# Altium PCB Carte_Standard_PCB.PcbDoc
Units mil, origin at the board's own origin, x right, y up, seen from the top; angles counter-clockwise.
Board outline 2680 x 2480 mil, 2 copper layers (Top Layer, Bottom Layer); 54 components, 82 nets, 284 pads, 68 vias.
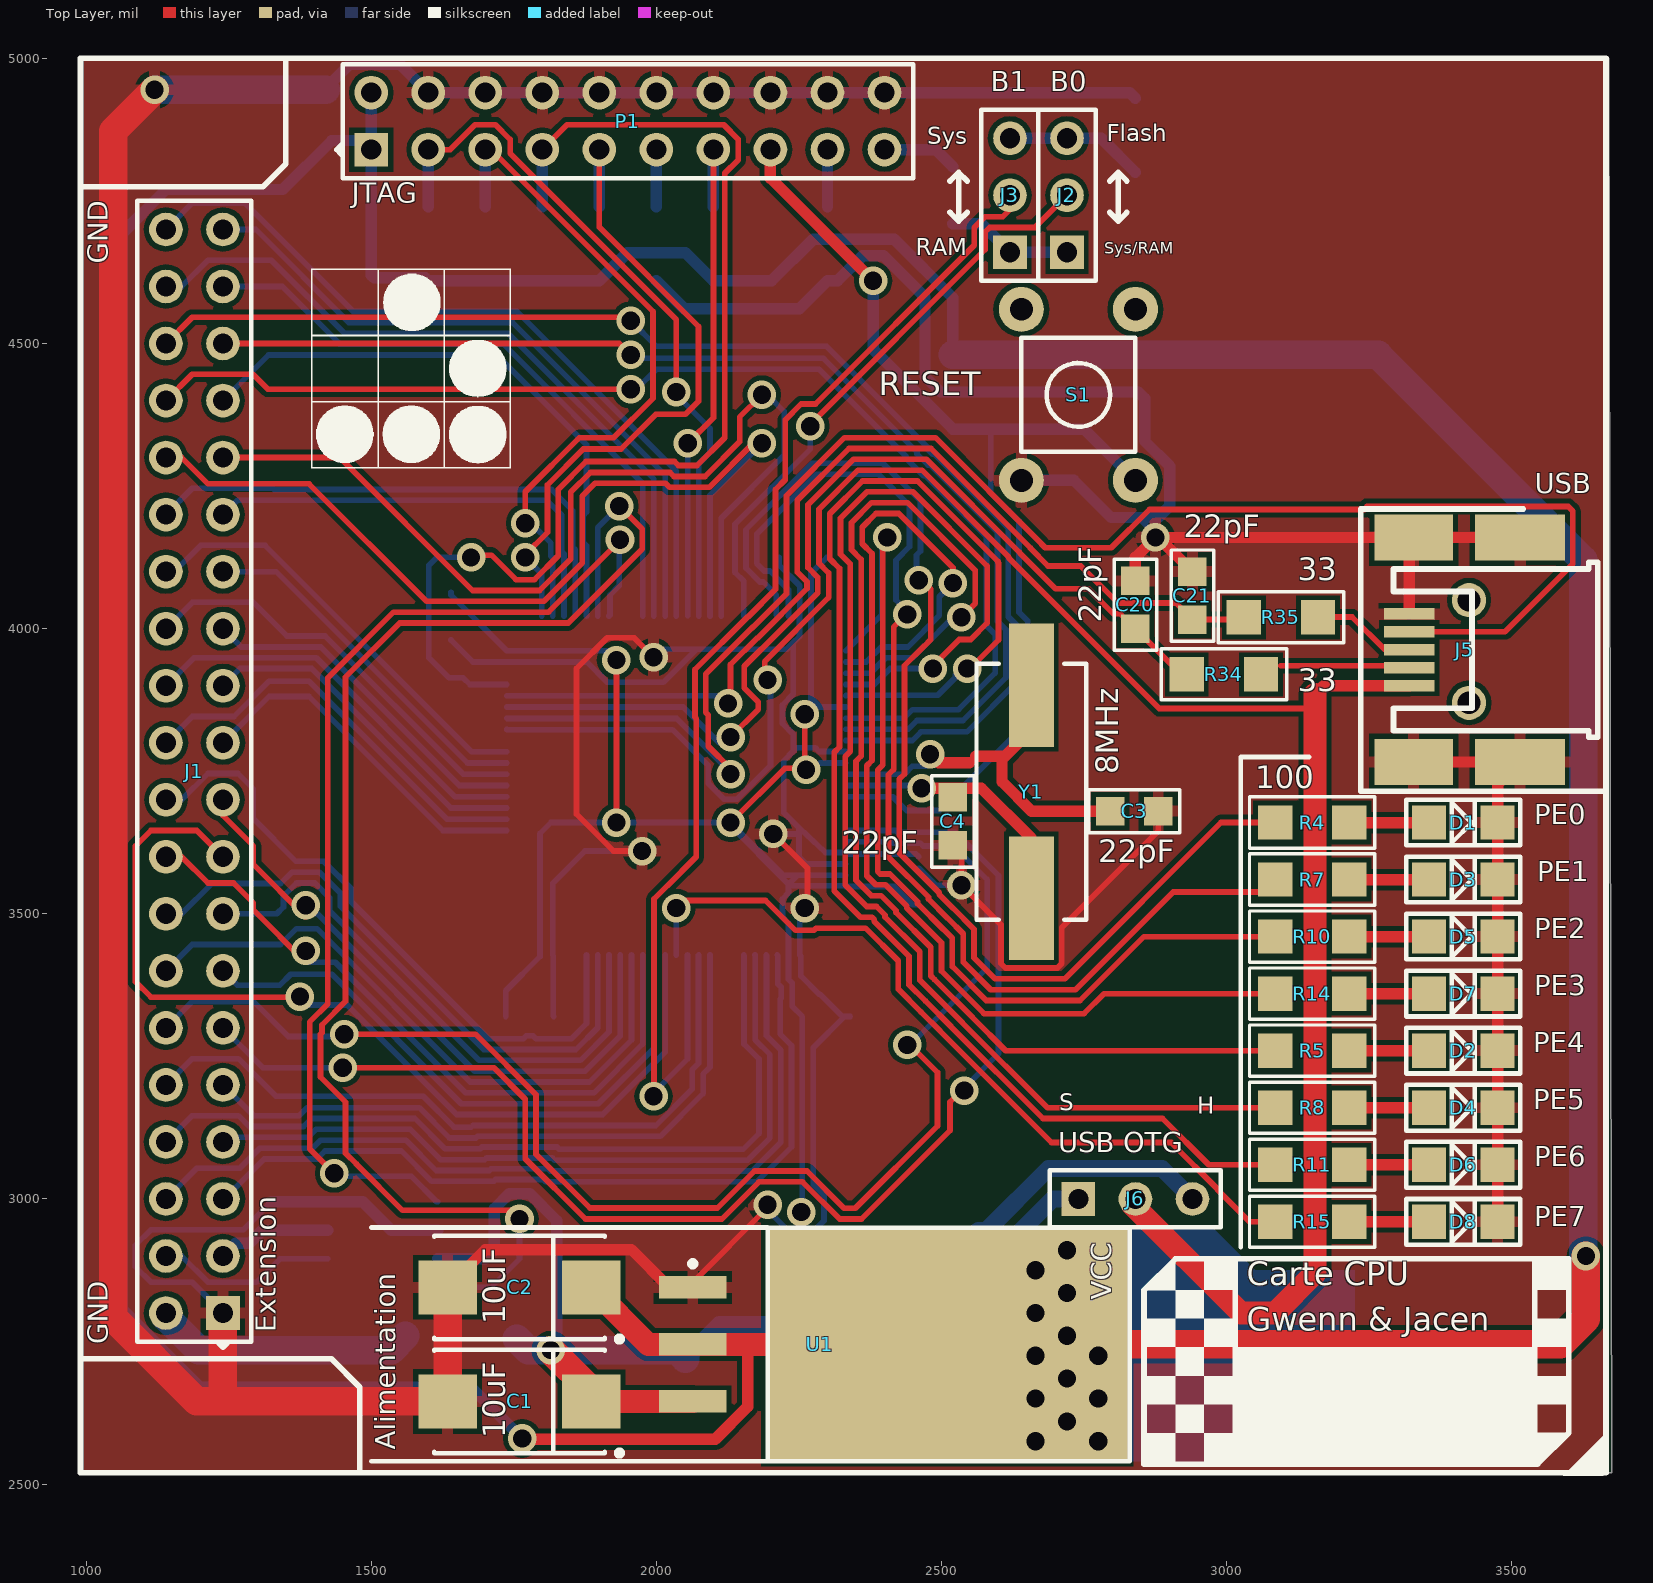
[diagram p0: Top Layer view]
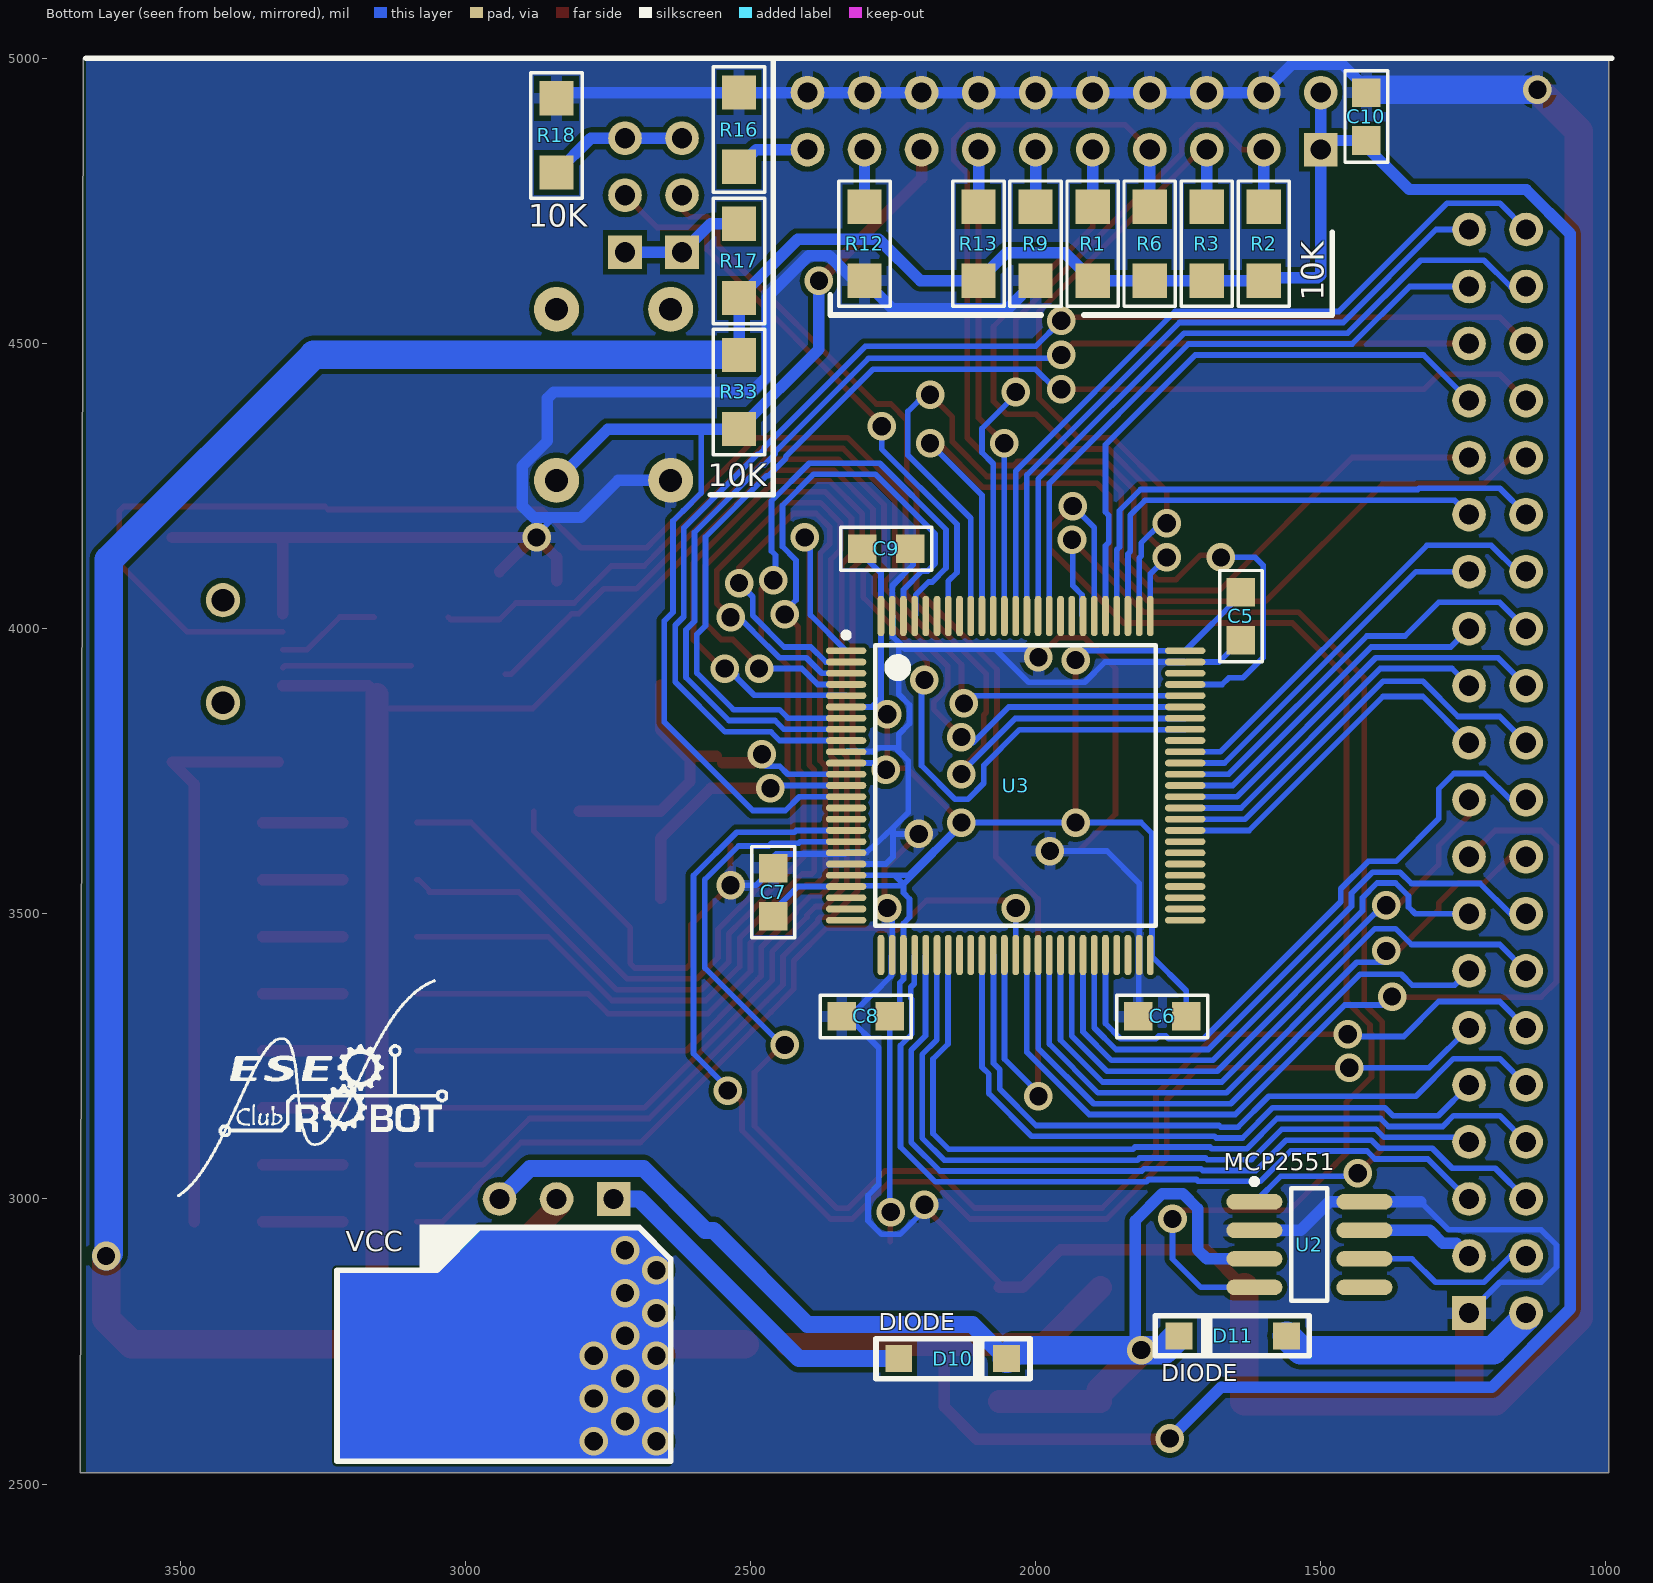
[diagram p1: Bottom Layer view, seen from below]

## Layer stack, top to bottom
Top Layer: signal copper 1.4
Dielectric: dielectric 12.6, FR-4, Dk 4.8
Bottom Layer: signal copper 1.4

## Board outline
995,5000 3670,5000 3675,2520 995,2520

## Design rules (kind name [scope] priority, off if disabled: settings)
Clearance Clearance_QFP [(InComponent('U3') OR InComponent('U4'))] p1: gap=7
Clearance [All] p2: gap=9
HoleSize [All] p1: absolutevalues=TRUE maxlimit=150 minlimit=32 maxpercent=80.000 minpercent=20.000
PlaneClearance [All] p1: clearance=40
PlaneConnect [All] p1: planeconnectstyle=Relief reliefexpansion=20 reliefentries=4 reliefconductorwidth=20 reliefairgap=10
PolygonConnect [All] p1: connectstyle=Relief reliefconductorwidth=20 reliefentries=4 polygonreliefangle="90 Angle"
RoutingVias [All] p1: holewidth=32 width=50 viastyle="Through Hole" minholewidth=32 minwidth=50 maxholewidth=40 maxwidth=50
SilkscreenOverComponentPads [All] p1: minsilkscreentomaskgap=10
SolderMaskExpansion [All] p1: expansion=4
TestPointUsage [All] p1: valid=0 allowmultiple=FALSE
Testpoint [All] p1: side=15 testpointundercomponent=TRUE minsize=40 maxsize=100 preferedsize=60 minholesize=0 maxholesize=40 preferedholesize=32 testpointgrid=1 style=1023 order=0-112345678
Width Width_POWER [(InNet('GND') OR InNet('VCC'))] p1: maxlimit=100 minlimit=10 preferedwidth=16
Width [All] p2: maxlimit=100 minlimit=8 preferedwidth=12
20 further rules are at their usual default settings.

## Components (designator, comment, footprint, x,y, rotation, side; value= is the part's Value field where it differs from the comment)
C1 "10uF" TC7343-2917 1760,2645 r180 top
C2 "10uF" TC7343-2917 1760,2845 r180 top
C3 "22pF" COND_CMS_0805 2880,3680 r180 top
C4 "22pF" COND_CMS_0805 2520,3620 r90 top
C5 "100nF" COND_CMS_0805 1640,3980 r90 bottom
C6 "100nF" COND_CMS_0805 1820,3320 r180 bottom
C7 "100nF" COND_CMS_0805 2460,3580 r270 bottom
C8 "100nF" COND_CMS_0805 2340,3320 r180 bottom
C9 "100nF" COND_CMS_0805 2220,4140 r0 bottom
C10 "100nF" COND_CMS_0805 1420,4940 r270 bottom
C20 "22pF" COND_CMS_0805 2840,4000 r90 top
C21 "22pF" COND_CMS_0805 2940,4100 r270 top
D1 "LED" LED_1206 3475,3660 r90 top
D2 "LED" LED_1206 3475,3260 r90 top
D3 "LED" LED_1206 3475,3560 r90 top
D4 "LED" LED_1206 3475,3160 r90 top
D5 "LED" LED_1206 3475,3460 r90 top
D6 "LED" LED_1206 3475,3060 r90 top
D7 "LED" LED_1206 3475,3360 r90 top
D8 "LED" LED_1206 3475,2960 r90 top
D10 "DIODE" DIODE_CMS_LL4000 2240,2720 r180 bottom
D11 "DIODE" DIODE_CMS_LL4000 1560,2760 r0 bottom
J1 "Extension" HEADER20X2 1240,2800 r90 top
J2 "Jumper" HEADER3 2720,4660 r90 top
J3 "Jumper" HEADER3 2620,4660 r90 top
J5 "USB" MINI_USB_B 3320,3900 r90 top
J6 "Jumper" HEADER3 2740,3000 r0 top
P1 "JTAG" HEADER10X2 1500,4840 r0 top
R1 "10K" RES_CMS_1206 1900,4740 r270 bottom
R2 "10K" RES_CMS_1206 1600,4740 r270 bottom
R3 "10K" RES_CMS_1206 1700,4740 r270 bottom
R4 "100" RES_CMS_1206 3215,3660 r180 top
R5 "100" RES_CMS_1206 3215,3260 r180 top
R6 "10K" RES_CMS_1206 1800,4740 r270 bottom
R7 "100" RES_CMS_1206 3215,3560 r180 top
R8 "100" RES_CMS_1206 3215,3160 r180 top
R9 "10K" RES_CMS_1206 2000,4740 r270 bottom
R10 "100" RES_CMS_1206 3215,3460 r180 top
R11 "100" RES_CMS_1206 3215,3060 r180 top
R12 "10K" RES_CMS_1206 2300,4610 r90 bottom
R13 "10K" RES_CMS_1206 2100,4610 r90 bottom
R14 "100" RES_CMS_1206 3215,3360 r180 top
R15 "100" RES_CMS_1206 3215,2960 r180 top
R16 "10K" RES_CMS_1206 2520,4940 r270 bottom
R17 "10K" RES_CMS_1206 2520,4580 r90 bottom
R18 "10K" RES_CMS_1206 2840,4800 r90 bottom
R33 "10K" RES_CMS_1206 2520,4480 r270 bottom
R34 "33" RES_CMS_1206 3060,3920 r180 top
R35 "33" RES_CMS_1206 3160,4020 r180 top
S1 "RESET" TOUCHE_KSA 2640,4260 r0 top
U1 "LM1086IS-3.3" TO-263 2300,2745 r0 top
U2 "A82C250/MCP2551" SOIC8 1520,2920 r180 bottom
U3 "STM32F107VBT6" LQFP100_N 2035,3725 r180 bottom
Y1 "8MHz" QUARTZ_CMS 2640,3840 r270 top

## Footprints (in the part's own frame and the unit in brackets; to place one, negate y for a bottom-side part, rotate by r counter-clockwise, add the part's x,y. Pads: shape width x height; smd on the part's side, far side on the other; paste and mask are expansions set on the pad)
COND_CMS_0805 [mil] "Capacitor; CMS 0805; 2mmx1.25mm"
  rect 50x50 smd: 1(0,0) 2(84,0)
  silkscreen extent -38,-38 122,38, body extent 1,-24 79,25, height 31
DIODE_CMS_LL4000 [mm] "Power Diode, MELF package"
  rect 1.2x1.2 smd: 1(0,0) 2(4.8,0)
  silkscreen extent -1.02,-0.89 5.84,0.89, body extent 0.66,-0.64 4.16,0.81, height 1.32
HEADER3 [mm] "Connector; Header; 3 Position"
  rect 1.5x1.5 hole 0.9: 1(0,0)
  round 1.5 hole 0.9: 2(2.54,0) 3(5.08,0)
  silkscreen extent -1.27,-1.27 6.35,1.27, body extent -1.27,-1.27 6.35,1.27, height 10.1
HEADER10X2 [mm] "Connector; Header; 10x2 Position"
  rect 1.5x1.5 hole 0.9: 1(0,0)
  round 1.5 hole 0.9: 2(0,2.54) 3(2.54,0) 4(2.54,2.54) 5(5.08,0) 6(5.08,2.54) 7(7.62,0) 8(7.62,2.54) 9(10.16,0) 10(10.16,2.54) 11(12.7,0) 12(12.7,2.54) 13(15.24,0) 14(15.24,2.54) 15(17.78,0) 16(17.78,2.54) 17(20.32,0) 18(20.32,2.54) 19(22.86,0) 20(22.86,2.54)
  silkscreen extent -1.52,-1.27 24.13,3.81, body extent -1.27,-1.27 24.13,3.81, height 10.1
HEADER20X2 [mm] "Connector; Header; 20x2 Position"
  rect 1.5x1.5 hole 0.9: 1(0,0)
  round 1.5 hole 0.9: 2(0,2.54) 3(2.54,0) 4(2.54,2.54) 5(5.08,0) 6(5.08,2.54) 7(7.62,0) 8(7.62,2.54) 9(10.16,0) 10(10.16,2.54) 11(12.7,0) 12(12.7,2.54) 13(15.24,0) 14(15.24,2.54) 15(17.78,0) 16(17.78,2.54) 17(20.32,0) 18(20.32,2.54) 19(22.86,0) 20(22.86,2.54) 21(25.4,0) 22(25.4,2.54) 23(27.94,0) 24(27.94,2.54) 25(30.48,0) 26(30.48,2.54) 27(33.02,0) 28(33.02,2.54) 29(35.56,0) 30(35.56,2.54) 31(38.1,0) 32(38.1,2.54) 33(40.64,0) 34(40.64,2.54) 35(43.18,0) 36(43.18,2.54) 37(45.72,0) 38(45.72,2.54) 39(48.26,0) 40(48.26,2.54)
  silkscreen extent -1.52,-1.27 49.53,3.81, body extent -1.4,-1.27 49.4,3.81, height 10.1
LED_1206 [mil] "3.2 x 1.6 mm SMD CHIP LED LAMP"
  rect 60x60 smd: A(0,120) C(0,0)
  silkscreen extent -40,-40 40,160, body extent -27,-5 30,125, height 54
LQFP100_N [mm] "Thin QFP, 100-Leads, Body 14x14mm, Pitch 0.5mm, IPC Medium Density"
  oval 1.8x0.3 smd: 1(-7.55,6) 2(-7.55,5.5) 3(-7.55,5) 4(-7.55,4.5) 5(-7.55,4) 6(-7.55,3.5) 7(-7.55,3) 8(-7.55,2.5) 9(-7.55,2) 10(-7.55,1.5) 11(-7.55,1) 12(-7.55,0.5) 13(-7.55,0) 14(-7.55,-0.5) 15(-7.55,-1) 16(-7.55,-1.5) 17(-7.55,-2) 18(-7.55,-2.5) 19(-7.55,-3) 20(-7.55,-3.5) 21(-7.55,-4) 22(-7.55,-4.5) 23(-7.55,-5) 24(-7.55,-5.5) 25(-7.55,-6) 51(7.55,-6) 52(7.55,-5.5) 53(7.55,-5) 54(7.55,-4.5) 55(7.55,-4) 56(7.55,-3.5) 57(7.55,-3) 58(7.55,-2.5) 59(7.55,-2) 60(7.55,-1.5) 61(7.55,-1) 62(7.55,-0.5) 63(7.55,0) 64(7.55,0.5) 65(7.55,1) 66(7.55,1.5) 67(7.55,2) 68(7.55,2.5) 69(7.55,3) 70(7.55,3.5) 71(7.55,4) 72(7.55,4.5) 73(7.55,5) 74(7.55,5.5) 75(7.55,6)
  oval 0.3x1.8 smd: 26(-6,-7.55) 27(-5.5,-7.55) 28(-5,-7.55) 29(-4.5,-7.55) 30(-4,-7.55) 31(-3.5,-7.55) 32(-3,-7.55) 33(-2.5,-7.55) 34(-2,-7.55) 35(-1.5,-7.55) 36(-1,-7.55) 37(-0.5,-7.55) 38(0,-7.55) 39(0.5,-7.55) 40(1,-7.55) 41(1.5,-7.55) 42(2,-7.55) 43(2.5,-7.55) 44(3,-7.55) 45(3.5,-7.55) 46(4,-7.55) 47(4.5,-7.55) 48(5,-7.55) 49(5.5,-7.55) 50(6,-7.55) 76(6,7.55) 77(5.5,7.55) 78(5,7.55) 79(4.5,7.55) 80(4,7.55) 81(3.5,7.55) 82(3,7.55) 83(2.5,7.55) 84(2,7.55) 85(1.5,7.55) 86(1,7.55) 87(0.5,7.55) 88(0,7.55) 89(-0.5,7.55) 90(-1,7.55) 91(-1.5,7.55) 92(-2,7.55) 93(-2.5,7.55) 94(-3,7.55) 95(-3.5,7.55) 96(-4,7.55) 97(-4.5,7.55) 98(-5,7.55) 99(-5.5,7.55) 100(-6,7.55)
  silkscreen extent -7.68,-6.25 6.25,6.82, body extent -8,-8 8,8, height 1.6
MINI_USB_B [mm] "Connector; USB; Type B; miniature; Pin Spacing=0.8mm"
  rect 0.5x2.25 smd: 1(0,0) 2(0.8,0) 3(1.6,0) 4(2.4,0) 5(3.2,0)
  rect 2.05x3.5 smd: 6(6.6,-0.2) 9(-3.4,-0.2)
  rect 2.05x4 smd: 7(6.6,-4.935) 8(-3.4,-4.935)
  round 1.524 hole 1.016: 10(3.81,-2.667) 11(-0.762,-2.667)
  silkscreen extent -2.3,-8.4 5.5,0.7, body extent -3.7,-8.51 7,0.69, height 3.95
QUARTZ_CMS [mil] "HC49/4HSMX CRYSTALS; 11.4mm x 4.9mm; Pin spacing=9.5mm"
  rect 216.53x78.73 smd: 1(-61.2,17.6) 2(312.8,17.6)
  silkscreen extent -98,-79 350,114, body extent -170,-70 421,107, height 99
RES_CMS_1206 [mil] "Resistor; CMS 1206; 3.2mmx1.6mm"
  rect 60x60 smd: 1(0,0) 2(130,0)
  silkscreen extent -45,-45 175,45, body extent 2,-30 128,33, height 39
SOIC8 [mm] "8-Pin Small Outline Integrated Circuit 1.27 mm Pitch, IPC Low Density"
  oval 2.5x0.7 smd: 1(-2.45,1.905) 2(-2.45,0.635) 3(-2.45,-0.635) 4(-2.45,-1.905) 5(2.45,-1.905) 6(2.45,-0.635) 7(2.45,0.635) 8(2.45,1.905)
  silkscreen extent -2.58,-2.5 0.8,2.93, body extent -4.32,-2.67 4.07,2.71, height 2.2
TC7343-2917 [mm] "Capacitor, SM Tantalum; Body 7.3 x 4.3 mm (LxW typ)"
  rect 2.6x2.4 smd: 1(-3.2,0) 2(3.2,0)
  silkscreen extent -4.58,-2.3 3.8,2.42, body extent -3.7,-2.13 3.6,2.17, height 2.2
TO-263 [mm] "D2-PAK, 4-Leads, Body 8.6x10.2mm, Pitch 2.54mm, Lead Span 14.2mm, IPC High Density"
  rect 3x1 smd: 1(-6,2.54) 2(-6,0) 3(-6,-2.54)
  rect 16.16x10.45 smd: 4(5.334,0)
  silkscreen extent -6.12,-5.21 13.46,5.2, body extent -7.11,-5 8.56,5, height 4.68
TOUCHE_KSA [mil] "Switch; Push Button; mounted Pcb; Pin Spacing=7.62mm/5.08mm"
  round 79 hole 40: 1(0,0) 2(200,0) 3(200,300) 4(0,300)
  silkscreen extent 0,50 200,250, body extent -20,0 224,312, height 157

## Part data
C1 C2: library part "Cap Pol3", "Polarized Capacitor (Surface Mount)"
C3 C4 C5 C6: library part CONDENSATEUR, "Capacitor"
C7 C8 C9 C10 C20 C21: library part "Cap Semi", "Capacitor (Semiconductor SIM Model)"
D1 D2 D3 D4 D5 D6 D7 D8: "Typical RED, GREEN, YELLOW, AMBER GaAs LED"
D10 D11: "Default Diode"
J1: library part CONNECTEUR_HE10_40
J2 J3 J6: library part BARRETTE3, "Header, 3-Pin"
J5: library part USB_Mini, "USB 1.1, Right Angle, SMT, A Type, Receptacle, 4 Position, White"
P1: library part "Header 10X2", "Header, 10-Pin, Dual row"
R1 R2 R3 R6 R9 R12 R13 R16 R17 R18 R33: library part "Res Semi", "Semiconductor Resistor"
R4 R5 R7 R8 R10 R11 R14 R15 R34 R35: library part RESISTANCE, "Resistor"
S1: library part "BOUTON POUSSOIR", "Switch"
U1: "1.5A Low Dropout Positive Regulators"
U2: library part MCP2551, "High Speed Can Transceiver"
U3: library part STM32F103VBT6, "STM32 ARM-based 32-bit MCU with 64 Kbytes Flash, 100-pin LQFP, Industrial Temperature"
Y1: library part QUARTZ, "Crystal Oscillator"

## Via types
v1: diameter 50, hole 32, Top Layer to Bottom Layer, 67 vias
v2: diameter 50/50 (per signal layer), hole 32, Top Layer to Bottom Layer, 1 vias

## Nets (pads, with @x,y where several pads share a name; then routed paths per layer and width w, separated by ;. In a path a pad name is that pad's centre, name@x,y a point inside that pad or via, vN(x,y) a via of type N, cw(c..) or ccw(c..) an arc to the next point about the centre after c; other vN are vias at no path point)
5V: C1.1 D10.2 D11.2 J6.3 U1.3 U2.3 | length 2172.7
  Top Layer w40: C1.1 U1.3
  Top Layer w50: v1(1815,2735) C1.1@1885.98,2664.02
  Bottom Layer w20: U2.3 1700,2895 1716,2911 1716,2983.23 1741.77,3009 1778.23,3009 1825,2962.23 v1@1825,2745
  Bottom Layer w30: D10.2 2111.02,2780 2400,2780 2565,2945 2579.26,2945 2687.78,3053.53 2886.47,3053.53 J6.3
  Bottom Layer w50: D11.2@1755,2755 1775,2735 v1(1815,2735) 2036.02,2735 D10.2
AN4: J1.5 U3.29 | length 1430.4
  Bottom Layer w10: J1.5 1242.37,3000 1312.37,3070 1404.85,3070 1418.85,3084 1552.89,3084 1605.89,3031 1714.83,3031 1717.83,3034 1802.17,3034 1806.17,3030 2175.72,3030 2237,3091.28 2237,3269.2 2217,3289.2 2217,3350.8 2219,3352.8 2219,3371.39 2212.85,3377.54 2212.85,3427.07 U3.29
AN5: J1.6 U3.30 | length 1505.5
  Bottom Layer w10: J1.6 1193.91,3053.91 1269.41,3053.91 1304.5,3089 1396.98,3089 1410.98,3103 1560.76,3103 1613.76,3050 1706.96,3050 1709.96,3053 1810.04,3053 1814.04,3049 2167.85,3049 2218,3099.15 2218,3261.33 2193.17,3286.17 2193.17,3427.07 U3.30
AN6: J1.7 U3.31 | length 1340.7
  Bottom Layer w10: J1.7 1248,3108 1389.11,3108 1403.11,3122 1568.63,3122 1621.63,3069 1699.09,3069 1702.09,3072 1817.91,3072 1821.91,3068 2159.98,3068 2199,3107.02 2199,3253.46 2173.48,3278.98 2173.48,3427.07 U3.31
AN7: J1.8 U3.32 | length 1433.2
  Bottom Layer w10: J1.8 1186.09,3146.09 1267.04,3146.09 1286.13,3127 1381.24,3127 1395.24,3141 1576.5,3141 1629.5,3088 1691.22,3088 1694.22,3091 1825.78,3091 1829.78,3087 2152.11,3087 2180,3114.89 2180,3245.59 2153.8,3271.8 2153.8,3427.07 U3.32
AN8: J1.9 U3.35 | length 1172.2
  Bottom Layer w10: J1.9 1294,3146 1373.37,3146 1387.37,3160 1584.37,3160 1637.37,3107 1683.35,3107 1686.35,3110 2007.02,3110 2082,3184.98 2082,3219.02 2094.06,3231.08 U3.35
AN9: J1.10 U3.36 | length 1259.1
  Bottom Layer w10: J1.10 1186.09,3246.09 1267.04,3246.09 1333.13,3180 1591.24,3180 1645.24,3126 1675.48,3126 1678.48,3129 1999.15,3129 2063,3192.85 2063,3226.89 2074,3237.89 2074,3427.39 U3.36
AN12: J1.11 U3.17 | length 2378.9
  Top Layer w10: v1(1450,3230) 1715,3230 1770,3175 1770,3070.65 1875.65,2965 2114.85,2965 2179.85,3030 2256.11,3030 2321.4,2964.71 2359.71,2964.71 2515,3120 2515,3170 2540,3195 v1(2540,3190)
  Bottom Layer w10: J1.11 1310,3230 v1(1450,3230) ; U3.17 2419.85,3646.26 2423.11,3643 2524.02,3643 2600,3567.02 2600,3255 v1@2541.5,3196.5
AN13: J1.12 U3.18 | length 2499
  Top Layer w10: v1(1452.59,3289) 1682.87,3289 1789,3182.87 1789,3078.52 1883.52,2984 2106.98,2984 2171.98,3049 2263.98,3049 2329.27,2983.71 2348.86,2983.71 2493,3127.85 2493,3222 2445,3270 v1(2440,3270)
  Bottom Layer w10: J1.12 1186.09,3346.09 1293.37,3346.09 1354.46,3285 1450,3285 1450,3290 1451,3289 v1(1452.59,3289) ; U3.18 2412.66,3626.57 2415.24,3624 2462.87,3624 2467.87,3619 2521.15,3619 2580,3560.15 2580,3405 2443,3268 2442,3268 v1(2440,3270)
GND: C1.2 C2.2 C3.1 C4.1 C5.1 C6.1 C7.1 C8.1 C9.1 C10.1 C20.2 C21.1 D1.C D2.C D3.C D4.C D5.C D6.C D7.C D8.C J1.1 J5.5 J5.6 J5.7 J5.8 J5.9 P1.4 P1.6 P1.8 P1.10 P1.12 P1.14 P1.16 P1.18 P1.20 R9.2 R12.1 R16.1 R18.2 S1.1 U1.1 U2.2 U2.8 U3.10 U3.19 U3.20 U3.27 U3.49 U3.74 U3.99 | length 14573.7
  Top Layer w10: v1(1975,3610) 1924.85,3610 1860,3674.85 1860,3930.15 1913.85,3984 1961,3984 v1(1995,3950) ; U1.1@2063.78,2853.78 2195,2985 v1(2195,2990) ; v1(2205,3640) 2265,3580 2265,3515 v1(2260,3510) ; C4.1@2535,3620 v1(2535,3550) 2604.23,3480.77 2604.23,3413.13 2612.43,3404.93 2702.77,3404.93 2710.97,3413.13 2710.97,3476.12 2880,3645.15 C3.1 ; J5.8@3506.73,3765 J5.8@3507.87,3766.14
  Top Layer w20: C2.2 1700.26,2911.24 1956.17,2911.24 2022.41,2845 U1.1 ; C20.2 2840,4125 v1(2875,4160) 2875.16,4159.84 v1@2880.16,4159.84 ; C21.1 v1@2880.16,4159.84 ; J5.5 3320,4151.97 J5.6 ; J5.9 3507.87,3766.14 J5.8 3475,3726.85 D1.C D3.C D5.C D7.C D2.C D4.C D6.C D8.C ; J5.7 J5.6 ; v1@2880.16,4159.84 J5.6
  Top Layer w50: v1(1120,4945) 1047.63,4872.63 1047.63,2791.63 1194.26,2645 1240,2645 ; J1.1 1240,2645 ; C2.2 C1.2 1240,2645
  Bottom Layer w10: J1.1 1186.09,2853.91 1113.63,2853.91 1086.63,2880.91 1086.63,2919.09 1113.63,2946.09 1276.09,2946.09 1325,2995 ; C10.1@1400,4940 C10.1@1412.94,4940 ; C5.1 1678.46,3941.54 U3.74 1878.31,3941.54 1913.85,3906 2012.56,3906 2070.55,3964 ; C6.1 1819.15,3320.85 1819.15,3427.07 U3.49 1818.46,3553.46 1875,3610 v1(1975,3610) ; v1(1995,3950) 2009,3964 2070.55,3964 ; v1(2195,2990) 2195,2980.8 2237.85,2937.95 2270.15,2937.95 2294,2961.8 2294,3006.15 2275,3025.15 2275,3265.15 2329.85,3320 C8.1 2325.8,3320 2286.8,3359 2285.13,3359 2253.31,3390.81 2253.31,3425.98 U3.27 2251.54,3496.54 2260,3505 v1(2260,3510) ; v1(2205,3640) 2245,3640 ; C9.1@2215,4125 2215,4111.87 2251.54,4075.33 U3.99 ; U3.20@2316.76,3587.2 U3.20 2262.8,3587.2 2250,3600 2250,3650.9 ; U3.10 2331.56,3784.74 2285.41,3784.74 2278.73,3791.42 2246.42,3791.42 2240,3785 ; C7.1 2490,3550 v1(2535,3550) ; C7.1@2460,3600 2455,3605 2334.13,3605 U3.19 2331.56,3607.57 2296.39,3607.57 2250,3650.9 ; 2845,4195 v1@2875,4165 ; 2070.55,3964 2228.46,3964 2240,3975.54 ; 2240,3785 2223.58,3768.58 2223.58,3677.32 2250,3650.9 ; 2240,3785 2240,3814.85 2221,3833.85 2221,3866.15 2240,3885.15 2240,3975.54 ; 2240,3975.54 2250.85,3986.39 ; 2250.85,3986.39 2251.54,3987.08 U3.99 ; 2250.85,3986.39 2250.85,4021.56 U3.99
  Bottom Layer w20: 1325,2995 U2.8 1485,2995 1535,2945 U2.2 ; C10.1@1412.94,4940 1462.94,4990 1550,4990 P1.4 P1.6 P1.8 P1.10 P1.12 P1.14 P1.16 P1.18 P1.20 R16.1 2830,4940 R18.2 ; R9.2 2049,4561 2251,4561 R12.1 2317.77,4610 2361.77,4654 2398.23,4654 2471,4581.23 2471,4442.13 2498.13,4415 2845,4415 2856,4404 2856,4329 2900,4285 2900,4215 2880,4195 2845,4195 2797.23,4195 2732.23,4260 S1.1
  Bottom Layer w50: v1(1120,4945) C10.1@1420,4945
NetC3_2: C3.2 U3.12 Y1.1 | length 717.6
  Top Layer w10: 2549,3765 2560,3776
  Top Layer w20: v1(2480,3780) 2495,3765 2549,3765 ; 2560,3776 2610,3776 ; Y1.1 2657.6,3822.6 2606,3771 2606,3731.77 2657.77,3680 C3.2@2800,3680
  Bottom Layer w10: U3.12 2434.53,3744.69 2448.85,3759 2473,3759 2480,3766 v1(2480,3780)
NetC4_2: C4.2 U3.13 Y1.2 | length 473.1
  Top Layer w20: v1(2465,3720) 2470,3715 2475,3715 2480,3720 2570,3720 2657.6,3632.4 Y1.2
  Bottom Layer w10: U3.13 2460,3725 v1(2465,3720)
NetC20_1: C20.1 R34.2 U3.70 | length 1774.7
  Top Layer w10: v1(2130,3810) 2130.15,3810 2178.85,3858.69 2178.85,3871 2154,3895.85 2154,3934.15 2183.85,3964 2184.61,3964 2283,4062.39 2283,4090 2266,4107 2266,4217.26 2345.74,4297 2473.6,4297 2636.95,4133.65 2636.95,4133.05 2700,4070 2757.33,4070 2801.33,4026 2814,4026 C20.1 2920,3920 R34.2
  Bottom Layer w10: U3.70 2047.2,3862.8 2110,3800 2120,3800 v1(2130,3810)
NetC21_2: C21.2 R35.2 U3.71 | length 1795.9
  Top Layer w10: v1@2130,3865 2130,3937.02 2175.98,3983 2176.74,3983 2264,4070.26 2264,4082.13 2247,4099.13 2247,4225.13 2337.87,4316 2481.47,4316 2655.95,4141.52 2655.95,4140.92 2686.87,4110 2744.2,4110 2809.2,4045 2911,4045 C21.2 3026,4016 R35.2
  Bottom Layer w10: U3.71 1795,3882.48 ; 1822.52,3882.48 1795,3882.48 ; v1(2125.69,3869) 2125.69,3877.31 2120.52,3882.48 1795,3882.48
NetD1_1: D1.A R4.1 | length 140
  Top Layer w20: R4.1 D1.A
NetD2_1: D2.A R5.1 | length 140
  Top Layer w20: R5.1 D2.A
NetD3_1: D3.A R7.1 | length 140
  Top Layer w20: R7.1 D3.A
NetD4_1: D4.A R8.1 | length 140
  Top Layer w20: R8.1 D4.A
NetD5_1: D5.A R10.1 | length 140
  Top Layer w20: R10.1 D5.A
NetD6_1: D6.A R11.1 | length 140
  Top Layer w20: R11.1 D6.A
NetD7_1: D7.A R14.1 | length 140
  Top Layer w20: R14.1 D7.A
NetD8_1: D8.A R15.1 | length 140
  Top Layer w20: R15.1 D8.A
NetD10_1: D10.1 J6.1 | length 596
  Bottom Layer w30: D10.1 2415,2720 2695,3000 J6.1@2720,3000
NetD11_1: D11.1 J1.2 | length 461.5
  Bottom Layer w50: J1.2 1140,2792.86 1197.86,2735 1535,2735 D11.1
NetJ1_3: J1.3 U2.7 | length 202.2
  Bottom Layer w20: J1.3 1262.09,2922.09 1286.03,2922.09 1308.94,2945 U2.7
NetJ1_4: J1.4 U2.6 | length 319.7
  Bottom Layer w10: J1.4 1167.54,2900 1213.63,2853.91 1298.91,2853.91 1340,2895 U2.6
NetJ1_29: J1.29 U3.78 | length 793.7
  Bottom Layer w10: J1.29 1265,4225 1808.15,4225 1834,4199.15 1834,4135.24 1838.15,4131.09 U3.78@1838.15,4022.24
NetJ1_30: J1.30 U3.79 | length 935.1
  Bottom Layer w10: J1.30 1186.09,4246.09 1327.91,4246.09 1330,4244 1816.02,4244 1853.06,4206.96 1853,4206.89 1853,4143.11 1857.83,4138.27 U3.79
NetJ1_31: J1.31 U3.92 | length 1743
  Top Layer w10: J1.31 1444.85,4300 1677.85,4067 1795,4067 1850,4122 1850,4239.39 1884.61,4274 2023.98,4274 2030.98,4267 2085.13,4267 2146,4327.87 2146,4371 v1(2185,4410)
  Bottom Layer w10: U3.92 2113.74,4193.74 2224,4304 2224,4381 2190,4415 v1(2185,4410)
NetJ1_32: J1.32 U3.91 | length 1679.2
  Top Layer w10: J1.32 1167.54,4300 1213.63,4253.91 1391.09,4253.91 1597,4048 1803,4048 1870,4115 1870,4232.52 1892.48,4255 2016.11,4255 2023.11,4248 2093,4248 2170,4325 v1(2185,4325)
  Bottom Layer w10: U3.91 2094.06,4234.06 v1(2185,4325)
NetJ2_1: J2.1 J3.1 R17.2 | length 220.7
  Bottom Layer w20: R17.2 2570,4710 J3.1 J2.1
NetJ2_2: J2.2 U3.94 | length 1034.5
  Top Layer w10: v1(2270,4355) 2267.71,4355 2267.71,4355.84 2576.47,4664.6 2576.47,4695.33 2584.67,4703.53 2663.53,4703.53 J2.2
  Bottom Layer w10: U3.94 2153.11,4083.35 2138,4098.46 2138,4183 2270,4315 v1(2270,4355)
NetJ2_3: J2.3 J3.3 R18.1 | length 244.9
  Bottom Layer w20: J3.3 J2.3 2780,4860 R18.1
NetJ3_2: J3.2 U3.37 | length 2146.5
  Top Layer w10: v1(1995,3180) 1996,3181 1996,3526.15 2018.85,3549 2019,3549 2070,3600 2070,3842.67 2067.69,3844.98 2067.69,3928.46 2160.24,4021 2161,4021 2209,4069 2209,4244 2226,4261 2226,4366.15 2253.85,4394 2279,4394 2557.47,4672.47 2557.47,4703.2 2576.8,4722.53 2607.53,4722.53 2620,4735 J3.2
  Bottom Layer w10: v1(1995,3180) 1995,3185.76 2054.69,3245.45 U3.37
NetJ5_1: J5.1 J6.2 U3.68 | length 3770.1
  Top Layer w10: v1(2195,3910) 2190,3915 2190,3942.52 2302,4054.52 2302,4097.87 2285,4114.87 2285,4209.39 2353.61,4278 2465.73,4278 2617.95,4125.78 2617.95,4123.92 2881.87,3860 3140,3860 3155,3875 3155,3885
  Top Layer w20: 3155,3885 3170,3900 J5.1
  Top Layer w40: J6.2@2835,2990 3025,2800 3085,2800 3155,2870 3155,3885
  Bottom Layer w10: U3.68 1738.25,3822.93 2028.33,3822.93 2091,3760.26 2091,3728.85 2118.85,3701 2141.15,3701 2200,3759.85 2200,3905.15 v1@2195,3910.15 ; v1(2195,3910) v1@2195,3910.15 ; v1@2195,3910.15 2194.85,3910.31 2194.85,3912.13 2195,3912.13 v1@2195,3910.15
NetJ5_2: J5.2 R34.1 | length 226.5
  Top Layer w10: 3095,3935 3316.5,3935 J5.2
NetJ5_3: J5.3 R35.1 | length 184.1
  Top Layer w10: R35.1 3160.56,4020.56 3220,4020.56 3277.56,3962.99 J5.3
NetJ5_4: J5.4 U3.69 | length 2963.2
  Top Layer w10: v1(2130,3745) 2130,3754.85 2091,3793.85 2091,3848.54 2086.69,3852.85 2086.69,3920.59 2168.11,4002 2168.87,4002 2228,4061.13 2228,4233 2330,4335 2489.34,4335 2674.95,4149.39 2674.95,4148.79 2681.74,4142 2797.66,4142 2864.66,4209 3241,4209 3246.2,4214.2 3598.83,4214.2 3607.03,4206 3607.03,4113.69 3487.83,3994.49 J5.4
  Bottom Layer w10: U3.69 1738.44,3842.43 2035.7,3842.43 2130,3748.13 v1(2130,3745)
NetP1_3: P1.3 R2.1 U3.90 | length 1268.3
  Top Layer w10: P1.3 1638.44,4840 1681.97,4883.53 1718.03,4883.53 1743.53,4858.03 1743.53,4833.5 2035,4542.02 v1(2035,4415)
  Bottom Layer w10: v1(2035,4415) 2030,4415 2094,4351 2094,4308.85 2074.37,4289.22 U3.90
  Bottom Layer w20: R2.1 P1.3
NetP1_5: P1.5 R3.1 U3.77 | length 1199.4
  Top Layer w10: P1.5 1710.15,4840 1994,4556.15 1994,4403.85 1925.15,4335 1865,4335 1770,4240 v1(1770,4185)
  Bottom Layer w10: v1(1770,4185) 1780,4185 1815,4150 1815,4127.37 1818.46,4123.9 U3.77
  Bottom Layer w20: R3.1 P1.5
NetP1_7: P1.7 R6.1 U3.72 | length 2044.4
  Top Layer w10: v1(1675,4125) 1679,4129 1710.85,4129 1753.85,4086 1786.15,4086 1828,4127.85 1828,4244.26 1876.74,4293 2031.85,4293 2038.85,4286 2071.15,4286 2120,4334.85 2120,4798.44 2143.53,4821.97 2143.53,4858.03 2118.03,4883.53 1843.53,4883.53 P1.7
  Bottom Layer w10: v1(1675,4125) 1615,4125 1601,4111 1601,3949.2 1636.2,3914 1661.15,3914 1672.99,3902.17 U3.72
  Bottom Layer w20: R6.1 P1.7
NetP1_9: P1.9 R1.1 U3.76 | length 1182.2
  Top Layer w10: v1(1770,4125) 1770,4129.85 1809,4168.85 1809,4252.13 1871.87,4315 1938.13,4315 1999.13,4376 2051.15,4376 2074,4398.85 2074,4529.89 1900,4703.89 P1.9
  Bottom Layer w10: v1@1777.5,4107.5 1787.5,4107.5 1798.78,4096.22 U3.76
  Bottom Layer w20: R1.1 P1.9
NetP1_11: P1.11 R9.1 | length 100
  Bottom Layer w20: R9.1 P1.11
NetP1_13: P1.13 R13.2 U3.89 | length 936.1
  Top Layer w10: v1(2055,4325) 2100,4370 P1.13
  Bottom Layer w10: U3.89@2055,4022.56 v1(2055,4325)
  Bottom Layer w20: R13.2 P1.13
NetP1_15: P1.15 R33.2 S1.2 U3.14 | length 1912.6
  Top Layer w20: P1.15 2200,4790 v1(2380,4610)
  Bottom Layer w10: U3.14 2414.53,3705.32 2438.85,3681 2496.15,3681 2651,3835.85 2651,4013.85 2636,4028.85 2636,4189 2618.5,4206.5 2617.84,4206.5 2586.5,4237.84 2586.5,4348.5
  Bottom Layer w20: v1(2380,4610) 2380,4490 R33.2 2750,4350 S1.2
NetP1_17: P1.17 R12.2 | length 100
  Bottom Layer w20: R12.2 P1.17
NetP1_19: P1.19 R16.2 | length 132.4
  Bottom Layer w20: P1.19 2490,4840 R16.2
NetR4_2: R4.2 U3.97 | length 2111.4
  Top Layer w10: v1(2460,4085) 2461,4086 2464,4086 2481,4069 2481,3981 2469,3969 2468.85,3969 2435,3935.15 2435,3745.15 2426,3736.15 2426,3607.09 2496,3537.09 2496,3533.85 2518.85,3511 2519,3511 2557,3473 2557,3423.11 2594.18,3385.93 2715.93,3385.93 2990,3660 R4.2
  Bottom Layer w10: U3.97 2210.39,4024.02 2210.39,4059.19 2187.57,4082 2181.33,4082 2157,4106.33 2157,4173.67 2273.33,4290 2396.87,4290 2463,4223.87 2463,4135.98 2456,4128.98 2456,4089 v1(2460,4085)
NetR5_2: R5.2 U3.3 | length 2149.1
  Top Layer w10: v1(2535,4020) 2559,4044 2559,4102.26 2440.26,4221 2377.22,4221 2342,4185.78 2342,4138.48 2359,4121.48 2359,3776.63 2350,3767.63 2350,3558.74 2376.82,3531.92 2393.69,3531.92 2420,3505.61 2420,3502.37 2481,3441.37 2481,3391.52 2487.52,3385 2487.63,3385 2555,3317.63 2555,3317.52 2612.52,3260 R5.2
  Bottom Layer w10: U3.3@2332.24,3921.85 2374.98,3921.85 2402.13,3949 2448.85,3949 2468.85,3969 2469,3969 2520,4020 v1(2535,4020) v1@2540,4020
NetR7_2: R7.2 U3.98 | length 2045.2
  Top Layer w10: v1(2440,4025) 2438,4025 2416,4003 2416,3753.02 2407,3744.02 2407,3599.22 2477,3529.22 2477,3525.98 2510.98,3492 2511.13,3492 2538,3465.13 2538,3415.24 2586.31,3366.93 2735.06,3366.93 2906.26,3538.13 R7.2@3060,3538.13 ; R7.2@3063.13,3538.13 R7.2@3060,3538.13 ; R7.2 3081.87,3560 R7.2@3060,3538.13
  Bottom Layer w10: U3.98@2231.85,4022.24 2231.85,4068.15 2199,4101 2189.2,4101 2176,4114.2 2176,4165.8 2281.2,4271 2389,4271 2444,4216 2444,4143.85 2421.15,4121 2421,4121 2420,4120 2420,4050 2440,4030 v1(2440,4025)
NetR8_2: R8.2 U3.4 | length 2331.1
  Top Layer w10: v1(2485,3930) 2485,3935 2531,3981 2551.15,3981 2580,4009.85 2580,4105.15 2579.95,4105.21 2579.95,4110.04 2449.99,4240 2369.35,4240 2323,4193.65 2323,4130.61 2340,4113.61 2340,3784.5 2331,3775.5 2331,3550.87 2368.95,3512.92 2385.82,3512.92 2401,3497.74 2401,3494.5 2462,3433.5 2462,3383.65 2479.65,3366 2479.76,3366 2536,3309.76 2536,3309.65 2685.65,3160 R8.2
  Bottom Layer w10: U3.4 2382.17,3902.17 2410,3930 v1(2485,3930) v1@2490,3930
NetR10_2: R10.2 U3.1 | length 1673.5
  Top Layer w10: v1@2397,4147 2397,3760.89 2388,3751.89 2388,3574.48 2392.56,3569.92 2409.43,3569.92 2458,3521.35 2458,3518.11 2503.11,3473 2503.26,3473 2519,3457.26 2519,3407.37 2578.44,3347.93 2742.93,3347.93 2855,3460 R10.2
  Bottom Layer w10: U3.1 2395,4023.98 2395,4150 v1(2405,4160)
NetR11_2: R11.2 U3.5 | length 2502.1
  Top Layer w10: v1(2545,3930) 2550,3930 2600,3980 2600,4115 2598.95,4116.05 2598.95,4117.91 2457.86,4259 2361.48,4259 2304,4201.52 2304,4122.74 2321,4105.74 2321,3792.37 2312,3783.37 2312,3539.87 2357.95,3493.92 2377.95,3493.92 2382,3489.87 2382,3486.63 2443,3425.63 2443,3375.78 2471.78,3347 2471.89,3347 2517,3301.89 2517,3301.78 2677.78,3141 2887.43,3141 2968.43,3060 R11.2
  Bottom Layer w10: U3.5 2332.93,3883.17 2493.32,3883.17 2524,3913.85 2524,3919 2535,3930 v1(2545,3930)
NetR14_2: R14.2 U3.2 | length 1983.4
  Top Layer w10: v1(2520,4080) 2520,4106.91 2424.91,4202 2385.09,4202 2361,4177.91 2361,4148.85 2378,4131.85 2378,3768.76 2369,3759.76 2369,3566.61 2384.69,3550.92 2401.56,3550.92 2439,3513.48 2439,3510.24 2500,3449.24 2500,3399.5 2574.5,3325 2750,3325 2785,3360 R14.2
  Bottom Layer w10: U3.2 2367.8,3941.54 2394.26,3968 2440.98,3968 2496,4023.02 2496,4056 v1(2520,4080)
NetR15_2: R15.2 U3.38 | length 1404.6
  Top Layer w10: v1(2035,3510) 2048.45,3523.45 2191.39,3523.45 2243.85,3471 2276.15,3471 2280.08,3474.92 2366.83,3474.92 2424,3417.76 2424,3367.91 2463.91,3328 2464.02,3328 2498,3294.02 2498,3293.91 2692.91,3099 2902.56,3099 2983.53,3018.03 2983.53,3016.47 3040,2960 R15.2
  Bottom Layer w10: U3.38 v1(2035,3510)
NetU2_1: U2.1 U3.82 | length 1871.1
  Top Layer w10: v1@1425,3055 v1(1435,3045) 1392,3088 1392,3310.43 1424,3342.43 1424,3914 1539,4029 1810.87,4029 1936.2,4154.33 v1(1936.2,4156)
  Bottom Layer w10: v1(1435,3045) 1440,3040 1570.02,3040 1615.02,2995 U2.1 ; U3.82 1918.67,4024.02 1918.67,4059.19 1935,4075.52 v1@1935,4156
NetU2_4: U2.4 U3.81 | length 2410.7
  Top Layer w10: v1(1760,2965) 1760,2980 1555,2980 1474,3061 1474,3061.15 1455,3080.15 1455,3169.85 1411,3213.85 1411,3288.98 1413.59,3291.57 1413.59,3305.15 1455,3346.57 1455,3915 1550,4010 1845.36,4010 1975.2,4139.85 1975.2,4174.8 v2(1935,4215)
  Bottom Layer w10: U2.4 1710,2845 1760,2895 1760,2980 v1(1760,2965) ; U3.81 1897.2,4177.2 v2(1935,4215)
PC12: J1.33 U3.80 | length 1040.7
  Bottom Layer w10: J1.33 1320,4480 1720,4480 1877.52,4322.48 1877.52,4204.54 1872,4199.02 1872,4150.98 1877.52,4145.46 U3.80
PC13: J1.34 U3.7 | length 2146.8
  Top Layer w10: J1.34 1186.09,4446.09 1292.46,4446.09 1318.55,4420 v1(1955,4420)
  Bottom Layer w10: v1(1955,4420) 1965,4420 2000,4455 2285,4455 2438,4302 2438,4298.46 2468.46,4268 2472,4268 2579,4161 2579,4005.24 2594,3990.24 2594,3922.13 2529.87,3858 2449.11,3858 2434.22,3843.11 U3.7
PC14: J1.35 U3.8 | length 2064
  Top Layer w10: J1.35 1935,4500 v1(1955,4480)
  Bottom Layer w10: v1@1965,4474 2292.87,4474 2457,4309.87 2457,4306.33 2476.33,4287 2479.87,4287 2598,4168.87 2598,4013.11 2613,3998.11 2613,3914.26 2537.74,3839 2456.98,3839 2441.4,3823.43 U3.8
PC15: J1.36 U3.9 | length 2270
  Top Layer w10: J1.36 1186.09,4546.09 1948.91,4546.09 v1(1955,4540)
  Bottom Layer w10: v1(1955,4540) 2000,4495 2298.74,4495 2476,4317.74 2476,4314.2 2484.2,4306 2487.74,4306 2617,4176.74 2617,4020.98 2632,4005.98 2632,3906.39 2544.61,3819 2463.85,3819 2448.85,3804 2332.5,3804 U3.9
PD4: J1.37 U3.85 | length 1111.6
  Bottom Layer w10: J1.37 1344,4600 1445,4499 1731.94,4499 1975.94,4255 U3.85
PD5: J1.38 U3.86 | length 1273.7
  Bottom Layer w10: J1.38 1167.54,4600 1213.63,4646.09 1324.78,4646.09 1452.87,4518 1739.81,4518 1995.63,4262.18 U3.86
PD6: J1.39 U3.87 | length 1200.8
  Bottom Layer w10: J1.39 1297.74,4700 1460.74,4537 1747.68,4537 2015.32,4269.37 U3.87
PD7: J1.40 U3.88 | length 1362.8
  Bottom Layer w10: J1.40 1186,4746 1278.61,4746 1468.61,4556 1755.55,4556 2035,4276.55 U3.88
PE8: J1.17 U3.39 | length 1701
  Top Layer w10: J1.17 1193.91,3646.09 1113.63,3646.09 1086.63,3619.09 1086.63,3380.91 1113.63,3353.91 1371.09,3353.91 1385,3340 1385,3345 v1(1375,3355)
  Bottom Layer w10: v1(1375,3355) 1385,3345 1385,3340 1458.11,3340 1650.11,3148 1906.09,3148 2015.32,3257.23 U3.39
PE10: J1.18 U3.41 | length 1243.4
  Top Layer w10: J1.18 1167.54,3600 1213.63,3553.91 1258.55,3553.91 1293.37,3519.09 1293.37,3506.63 1385,3415 v1(1385,3435)
  Bottom Layer w10: v1(1385,3435) 1385,3420 1390,3415 1436.85,3415 1665.85,3186 1890.35,3186 1975.94,3271.59 U3.41
PE12: J1.19 U3.43 | length 1134.3
  Top Layer w10: J1.19 1240,3672.46 1293.37,3619.09 1293.37,3586.63 1385,3495 1384.39,3495 1385,3495.61 v1(1385,3515)
  Bottom Layer w10: v1(1385,3515) 1385,3500 1405.59,3500 1681.59,3224 1874.61,3224 1936.57,3285.96 U3.43
PE15: J1.20 U3.46 | length 1128.6
  Bottom Layer w10: J1.20 1167.54,3700 1213.63,3746.09 1266.37,3746.09 1293.37,3719.09 1293.37,3666.63 1368,3592 1416.89,3592 1465,3543.89 1465,3521.2 1705.2,3281 1766.8,3281 1771.8,3286 1784.2,3286 1789.2,3281 1851,3281 1877.52,3307.52 U3.46
T1_CH1: J1.13 U3.40 | length 1071.6
  Bottom Layer w10: J1.13 1265.05,3374.95 1339.8,3374.95 1358.85,3394 1430.98,3394 1657.98,3167 1898.22,3167 1995.63,3264.41 U3.40
T1_CH2: J1.14 U3.42 | length 1137.9
  Bottom Layer w10: J1.14 1186.09,3446.09 1340.93,3446.09 1368.85,3474 1404.72,3474 1673.72,3205 1882.48,3205 1956.26,3278.78 U3.42
T1_CH3: J1.15 U3.44 | length 1008.1
  Bottom Layer w10: J1.15 1334.24,3500 1346,3511.76 1346,3531.15 1368.85,3554 1401.15,3554 1427,3528.15 1427,3505.46 1689.46,3243 1866.74,3243 1916.89,3293.15 U3.44
T1_CH4: J1.16 U3.45 | length 1072.9
  Bottom Layer w10: J1.16 1167.54,3500 1220.54,3553 1340.98,3553 1360.98,3573 1409.02,3573 1446,3536.02 1446,3513.33 1697.33,3262 1858.87,3262 1897.2,3300.33 U3.45
T3_CH1: J1.25 U3.63 | length 611.7
  Bottom Layer w10: J1.25 1272,3968 1411.35,3968 1654.35,3725 U3.63
T3_CH2: J1.26 U3.64 | length 746.7
  Bottom Layer w10: J1.26 1186.09,4046.09 1293.37,4046.09 1352.46,3987 1415,3987 ; 1410,3987 1415,3987 ; U3.64 1661.53,3744.69 1419.22,3987 1415,3987
T3_CH3: J1.27 U3.65 | length 636.8
  Bottom Layer w10: J1.27 1333.09,4100 1668.72,3764.37 U3.65
T3_CH4: J1.28 U3.66 | length 766.8
  Bottom Layer w10: J1.28 1155,4100 1201.09,4146.09 1313.91,4146.09 1675.94,3784.06 U3.66
T4_CH1: J1.21 U3.59 | length 628.5
  Bottom Layer w10: J1.21 1320.97,3880.97 1390.9,3880.97 1625.61,3646.26 U3.59
T4_CH2: J1.22 U3.60 | length 742.6
  Bottom Layer w10: J1.22 1186.09,3846.09 1259.22,3846.09 1320.97,3907.84 1390.9,3907.84 1632.8,3665.94 U3.60
T4_CH3: J1.23 U3.61 | length 611.4
  Bottom Layer w10: J1.23 1270,3930 1395.61,3930 1639.98,3685.63 U3.61
T4_CH4: J1.24 U3.62 | length 719
  Bottom Layer w10: J1.24 1189,3949 1403.48,3949 1647.16,3705.32 U3.62
VCC: C2.1 C5.2 C6.2 C7.2 C8.2 C9.2 C10.2 P1.1 P1.2 R1.2 R2.2 R3.2 R6.2 R13.1 R17.1 R33.1 U1.2 U1.4 U3.6 U3.11 U3.21 U3.22 U3.28 U3.50 U3.75 U3.100 | length 12968.8
  Top Layer w10: v1(1930,3660) v1(1930,3945) ; v1(2130,3660) 2225,3755 v1@2260,3755 ; v1(2254,2976.95) 2254,2989 2255,2990 U1.4@2255,2925 ; v1(2260,3850) v1@2260,3755 ; v1(2262.58,3752.42) v1@2260,3755
  Top Layer w20: v1(1765,2580) 1766.24,2578.76 2103.15,2578.76 2160,2635.61 2160,2745
  Top Layer w40: C2.1 1985.98,2745 U1.2 2160,2745 U1.4@2435,2745
  Top Layer w50: U1.4 3585,2745 3630,2790 v1(3630,2900)
  Bottom Layer w10: C5.2 1640,4058.98 U3.75 1913.78,3961.22 v1(1930,3945) ; C6.2 1736,3364.98 1796,3424.98 1796,3641 1815,3660 2123.7,3660 2231.85,3551.85 ; v1(2130,3660) 2130,3659.85 2222.33,3567.52 2247.52,3567.52 ; v1(2254,2976.95) 2254,2989 2256,2991 C8.2 2238,3338 2238,3379.26 2231.85,3385.41 2231.85,3427.76 2231.85,3483 2221,3493.85 2221,3526.15 2231.85,3537 2231.85,3545 ; v1(2260,3850) 2265,3850 2271.22,3856.22 2271.22,3878.78 ; v1(2262.58,3752.42) 2274.96,3752.42 2286.91,3764.37 U3.11 ; C9.2@2299,4125 2271.22,4097.22 U3.100 2271.22,3878.78 ; U3.21 2247.52,3567.52 ; U3.6 2287.2,3862.8 2271.22,3878.78 ; C7.2@2460,3516 2449,3516 2417.17,3547.83 U3.22 2331.08,3549 2235.85,3549 2231.85,3545 ; R33.1 R33.1@2540,4460 ; 2231.85,3545 2231.85,3551.85 ; 2231.85,3551.85 2247.52,3567.52
  Bottom Layer w20: P1.2 P1.1 ; v1(1765,2580) 1675,2670 1200,2670 1062.63,2807.37 1062.63,4692.63 1140,4770 1345,4770 1431,4856 1484,4856 P1.1 ; R33.1 R17.1 2417,4683 2275,4683 2202,4610 R13.1 2051,4659 1949,4659 R1.2 R6.2 R3.2 R2.2 1595,4615 1505,4615 1500,4620 P1.1
  Bottom Layer w50: R33.1 3265.51,4480 3625,4120.51 3625,2905 v1(3630,2900)
  other v1: 2665,2575 2775,2575 2720,2610 2665,2650 2775,2650 2720,2685 2665,2725 2775,2725 2720,2760 2665,2800 2720,2835 2665,2875 2720,2910
pads on no net: J5.10 J5.11 S1.3 S1.4 U2.5 U3.15 U3.16 U3.23 U3.24 U3.25 U3.26 U3.33 U3.34 U3.47 U3.48 U3.51 U3.52 U3.53 U3.54 U3.55 U3.56 U3.57 U3.58 U3.67 U3.73 U3.83 U3.84 U3.93 U3.95 U3.96

## Polygon pours and split planes (outlines as drawn)
GND on Top Layer "GND" (solid, remove dead copper, pour order 1000): 995,5000 3665,5000 3665,2520 995,2520
GND on Bottom Layer "GND" (solid, remove dead copper, pour order 1001): 995,5000 3665,5000 3665,2520 995,2520

## Other copper
Bottom Layer:
  region net VCC: 2645,2900 2695,2950 2975,2950 3050,2875 3225,2875 3225,2540 2645,2540

## Silkscreen, mask and mechanical layers (free items; w line width, h text height)
Top Overlay:
  drawing of 1928 lines, arcs and shapes, not listed
  text "B1" at 2586,4930 h60
  text "B0" at 2691,4930 h60
  text "Flash" at 2790,4845 h50
  text "Sys" at 2475,4840 h50
  text "Sys/RAM" at 2785,4650 h35
  text "RAM" at 2455,4645 h50
  text "GND" at 1050,4640 h60 r90
  text "PE0" at 3539,3645 h60
  text "PE1" at 3545,3545 h60
  text "PE2" at 3539,3445 h60
  text "PE3" at 3539,3345 h60
  text "PE4" at 3538,3245 h60
  text "S" at 2706,3145 h50
  text "PE5" at 3538,3145 h60
  text "H" at 2948,3140 h50
  text "USB OTG" at 2705,3070 h60
  text "PE6" at 3539,3045 h60
  text "PE7" at 3539,2940 h60
  text "Carte CPU" at 3035,2835 h70
  text "Gwenn & Jacen" at 3035,2755 h70
  text "GND" at 1050,2745 h60 r90
  text "Alimentation" at 1554,2560 h60 r90
Bottom Overlay:
  drawing of 1723 lines, arcs and shapes, not listed
  text "MCP2551" at 1670,3050 h30
  text "VCC" at 3210,2896 h60
Top Solder:
  region: 995,5000 1350,5000 1350,4815 1310,4775 995,4775
  region: 990,2720 1430,2720 1480,2670 1480,2515 990,2515
Bottom Solder:
  region: 2645,2900 2695,2950 2975,2950 3050,2875 3225,2875 3225,2540 2645,2540
Drill Drawing:
  lines w10: 3665,2520 990,2520 990,5000 3665,5000

## Text inside footprints (layer, text, board x,y; h text height)
U1: Top Overlay "VCC" at 2810,2822.95 h60 r90